# Altium PCB fastic-userboard.PcbDoc (part 2 of 2)
Units mm, origin at the board's own origin, x right, y up, seen from the top; angles counter-clockwise.
Board outline 60 x 60 mm, 4 copper layers (Top Layer, GND, HV, Bottom Layer), stack 1.539 mm thick; 133 components, 59 nets, 357 pads, 534 vias.
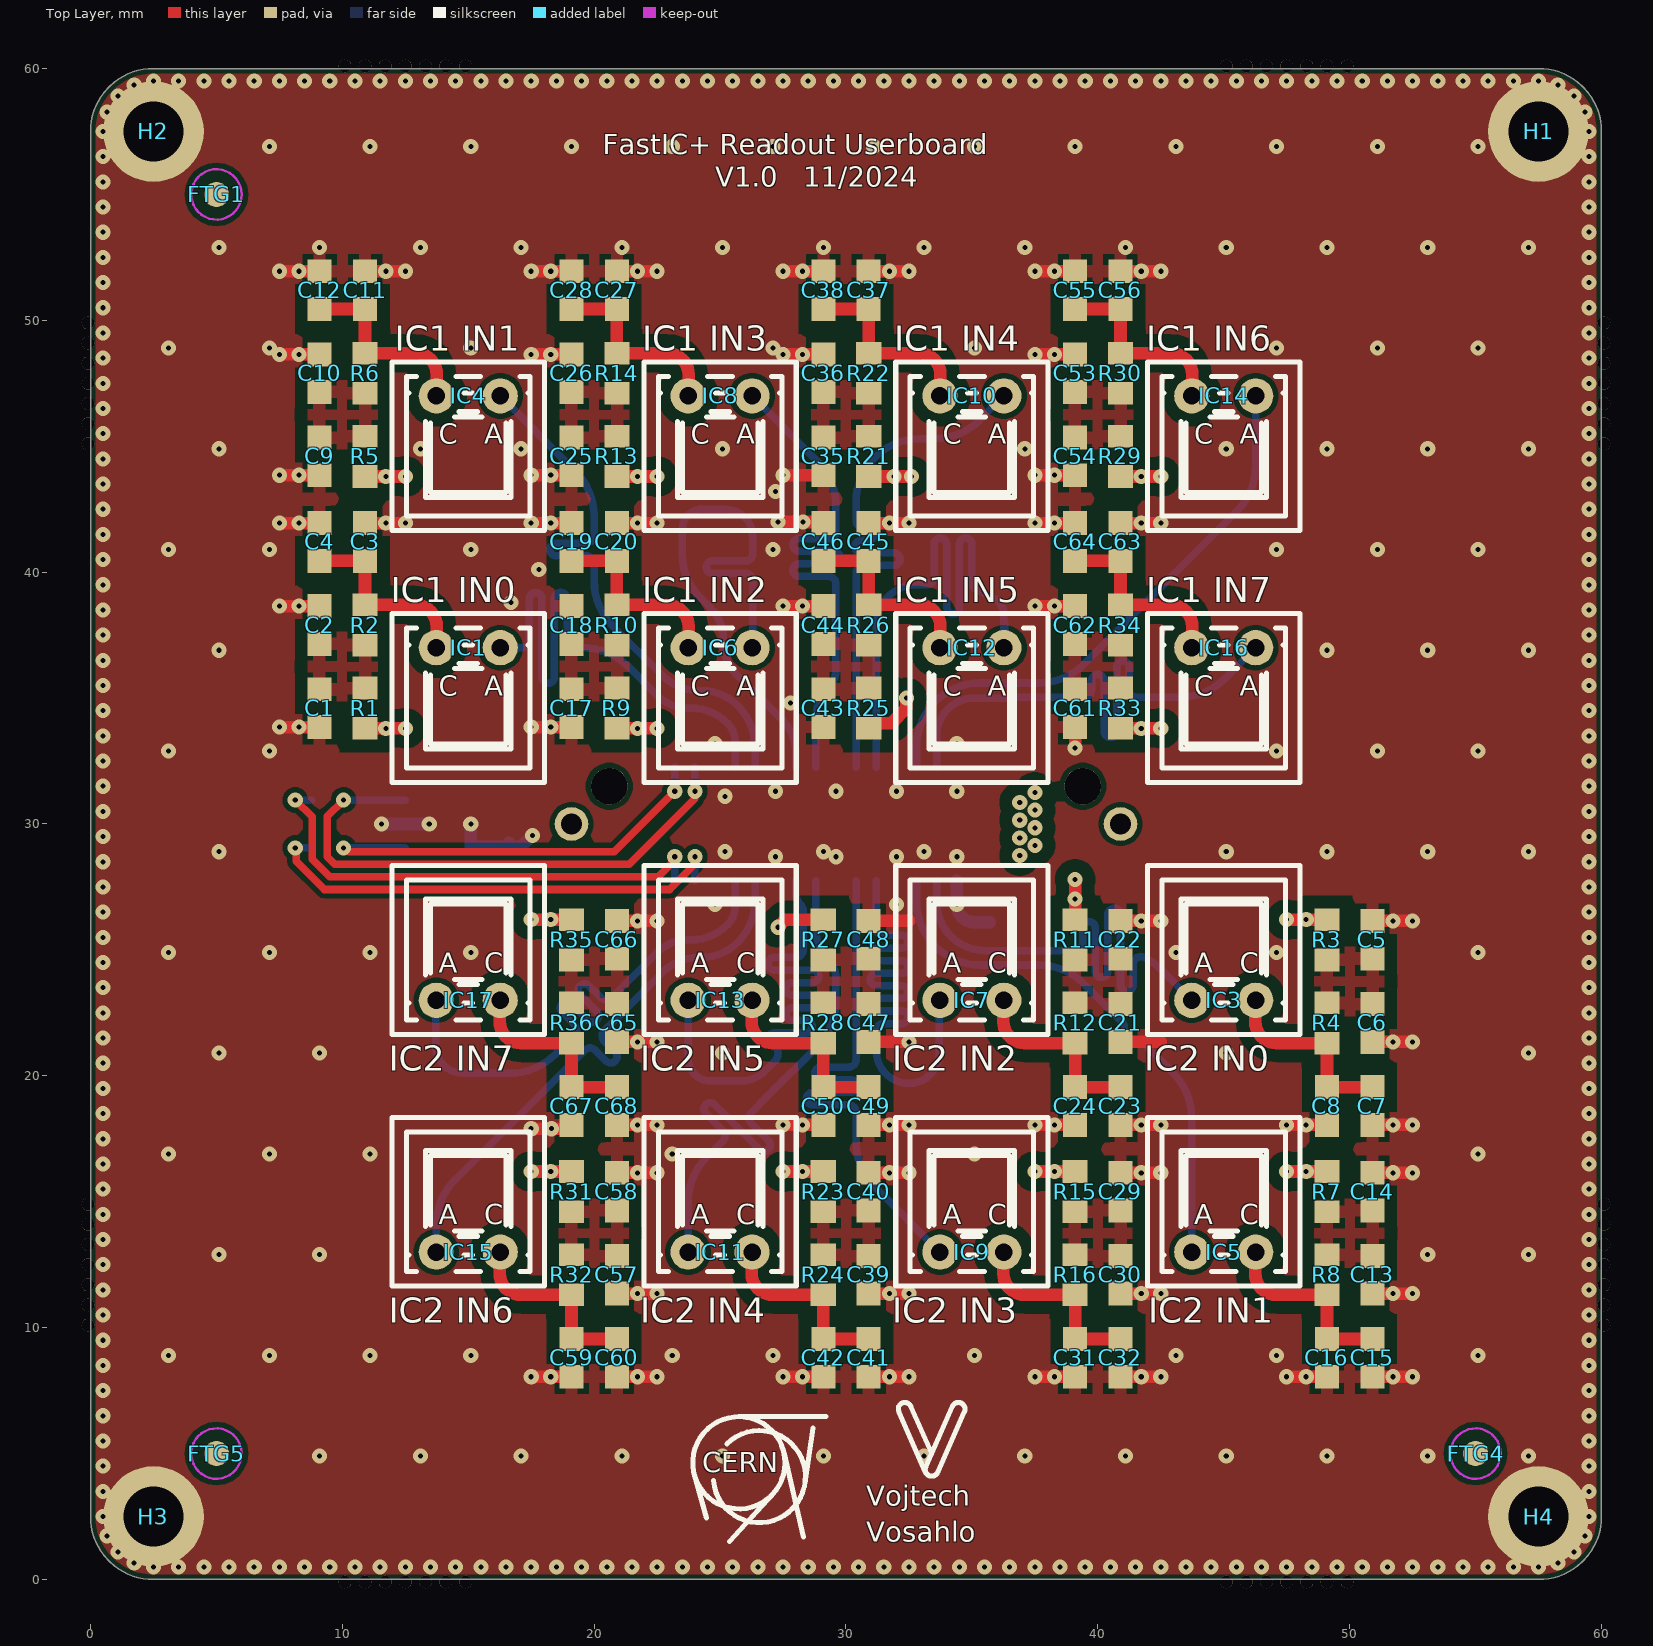
[diagram p0: Top Layer view]

## Silkscreen, mask and mechanical layers (free items; w line width, h text height) (continued)
Mechanical 5: (continued)
  lines w0.381: 75.19,8.239 85.602,8.239 129.023,8.239 149.592,8.239 166.098,8.239 ; 75.19,11.287 85.602,11.287 129.023,11.287 149.592,11.287 166.098,11.287 ; 75.19,14.335 85.602,14.335 129.023,14.335 149.592,14.335 166.098,14.335 ; 75.19,17.383 85.602,17.383 129.023,17.383 149.592,17.383 166.098,17.383 ; 75.19,20.431 85.602,20.431 129.023,20.431 149.592,20.431 166.098,20.431 ; 75.19,23.479 85.602,23.479 129.023,23.479 149.592,23.479 166.098,23.479 ; 75.19,26.527 85.602,26.527 129.023,26.527 149.592,26.527 166.098,26.527 ; 75.19,29.575 85.602,29.575 129.023,29.575 149.592,29.575 166.098,29.575 ; 75.19,32.623 85.602,32.623 129.023,32.623 149.592,32.623 166.098,32.623 ; 75.19,35.671 85.602,35.671 129.023,35.671 149.592,35.671 166.098,35.671 ; 75.19,38.719 85.602,38.719 129.023,38.719 149.592,38.719 166.098,38.719 ; 75.19,41.767 85.602,41.767 129.023,41.767 149.592,41.767 166.098,41.767 ; 75.19,44.815 85.602,44.815 129.023,44.815 149.592,44.815 166.098,44.815 ; 75.19,47.863 85.602,47.863 129.023,47.863 149.592,47.863 166.098,47.863 ; 75.19,50.911 166.098,50.911 ; 85.602,53.959 85.602,5.191 ; 129.023,53.959 129.023,5.191 ; 149.592,53.959 149.592,5.191 ; 85.602,5.191 129.023,5.191 ; 85.602,5.191 75.19,5.191 75.19,53.959 166.098,53.959 166.098,5.191 149.592,5.191 ; 129.023,5.191 149.592,5.191
  text "Layer" at 76.968,51.673 h1.52
  text "Name" at 87.38,51.673 h1.52
  text "Material" at 130.801,51.673 h1.52
  text "Thickness" at 151.37,51.673 h1.52
  text "Top Overlay" at 87.38,48.625 h1.52
  text "Top Solder" at 87.38,45.577 h1.52
  text "SM-001" at 130.801,45.577 h1.52
  text "0.025mm" at 151.37,45.577 h1.52
  text "Top Copper Plating (ENIG)" at 87.38,42.529 h1.52
  text "Nickel, Gold" at 130.801,42.529 h1.52
  text "0.005mm" at 151.37,42.529 h1.52
  text "1" at 76.968,39.481 h1.52
  text "Top Layer" at 87.38,39.481 h1.52
  text "Copper" at 130.801,39.481 h1.52
  text "0.018mm" at 151.37,39.481 h1.52
  text "Dielectric 1 - PR7628" at 87.38,36.433 h1.52
  text "PP-021" at 130.801,36.433 h1.52
  text "0.180mm" at 151.37,36.433 h1.52
  text "Dielectric 2 - PR7628" at 87.38,33.385 h1.52
  text "PP-021" at 130.801,33.385 h1.52
  text "0.180mm" at 151.37,33.385 h1.52
  text "2" at 76.968,30.337 h1.52
  text "GND" at 87.38,30.337 h1.52
  text "Copper" at 130.801,30.337 h1.52
  text "0.035mm" at 151.37,30.337 h1.52
  text "Dielectric 3 - Core FR4" at 87.38,27.289 h1.52
  text "Core-039" at 130.801,27.289 h1.52
  text "0.711mm" at 151.37,27.289 h1.52
  text "3" at 76.968,24.241 h1.52
  text "HV" at 87.38,24.241 h1.52
  text "Copper" at 130.801,24.241 h1.52
  text "0.035mm" at 151.37,24.241 h1.52
  text "Dielectric 4 - PR7628" at 87.38,21.193 h1.52
  text "PP-021" at 130.801,21.193 h1.52
  text "0.180mm" at 151.37,21.193 h1.52
  text "Dielectric 5 - PR7628" at 87.38,18.145 h1.52
  text "PP-021" at 130.801,18.145 h1.52
  text "0.180mm" at 151.37,18.145 h1.52
  text "4" at 76.968,15.097 h1.52
  text "Bottom Layer" at 87.38,15.097 h1.52
  text "Copper" at 130.801,15.097 h1.52
  text "0.018mm" at 151.37,15.097 h1.52
  text "Bottom Surface Finish (ENIG)" at 87.38,12.049 h1.52
  text "Nickel, Gold" at 130.801,12.049 h1.52
  text "0.005mm" at 151.37,12.049 h1.52
  text "Bottom Solder" at 87.38,9.001 h1.52
  text "SM-001" at 130.801,9.001 h1.52
  text "0.025mm" at 151.37,9.001 h1.52
  text "Bottom Overlay" at 87.38,5.953 h1.52